# Altium PCB ART_CARD Rev 5.PcbDoc (part 11 of 13)
Units mil, origin at the board's own origin, x right, y up, seen from the top; angles counter-clockwise.
Board outline 6600.39 x 3903.54 mil, 8 copper layers (Top, Inner Layer 2, Inner Layer 3, Inner Layer 4, Inner Layer 5, Inner Layer 6, Inner Layer 7, Bottom), stack 63.111 mil thick; 542 components, 382 nets, 2410 pads, 1433 vias.
Unrouted connection lines stored in the file: 1247.
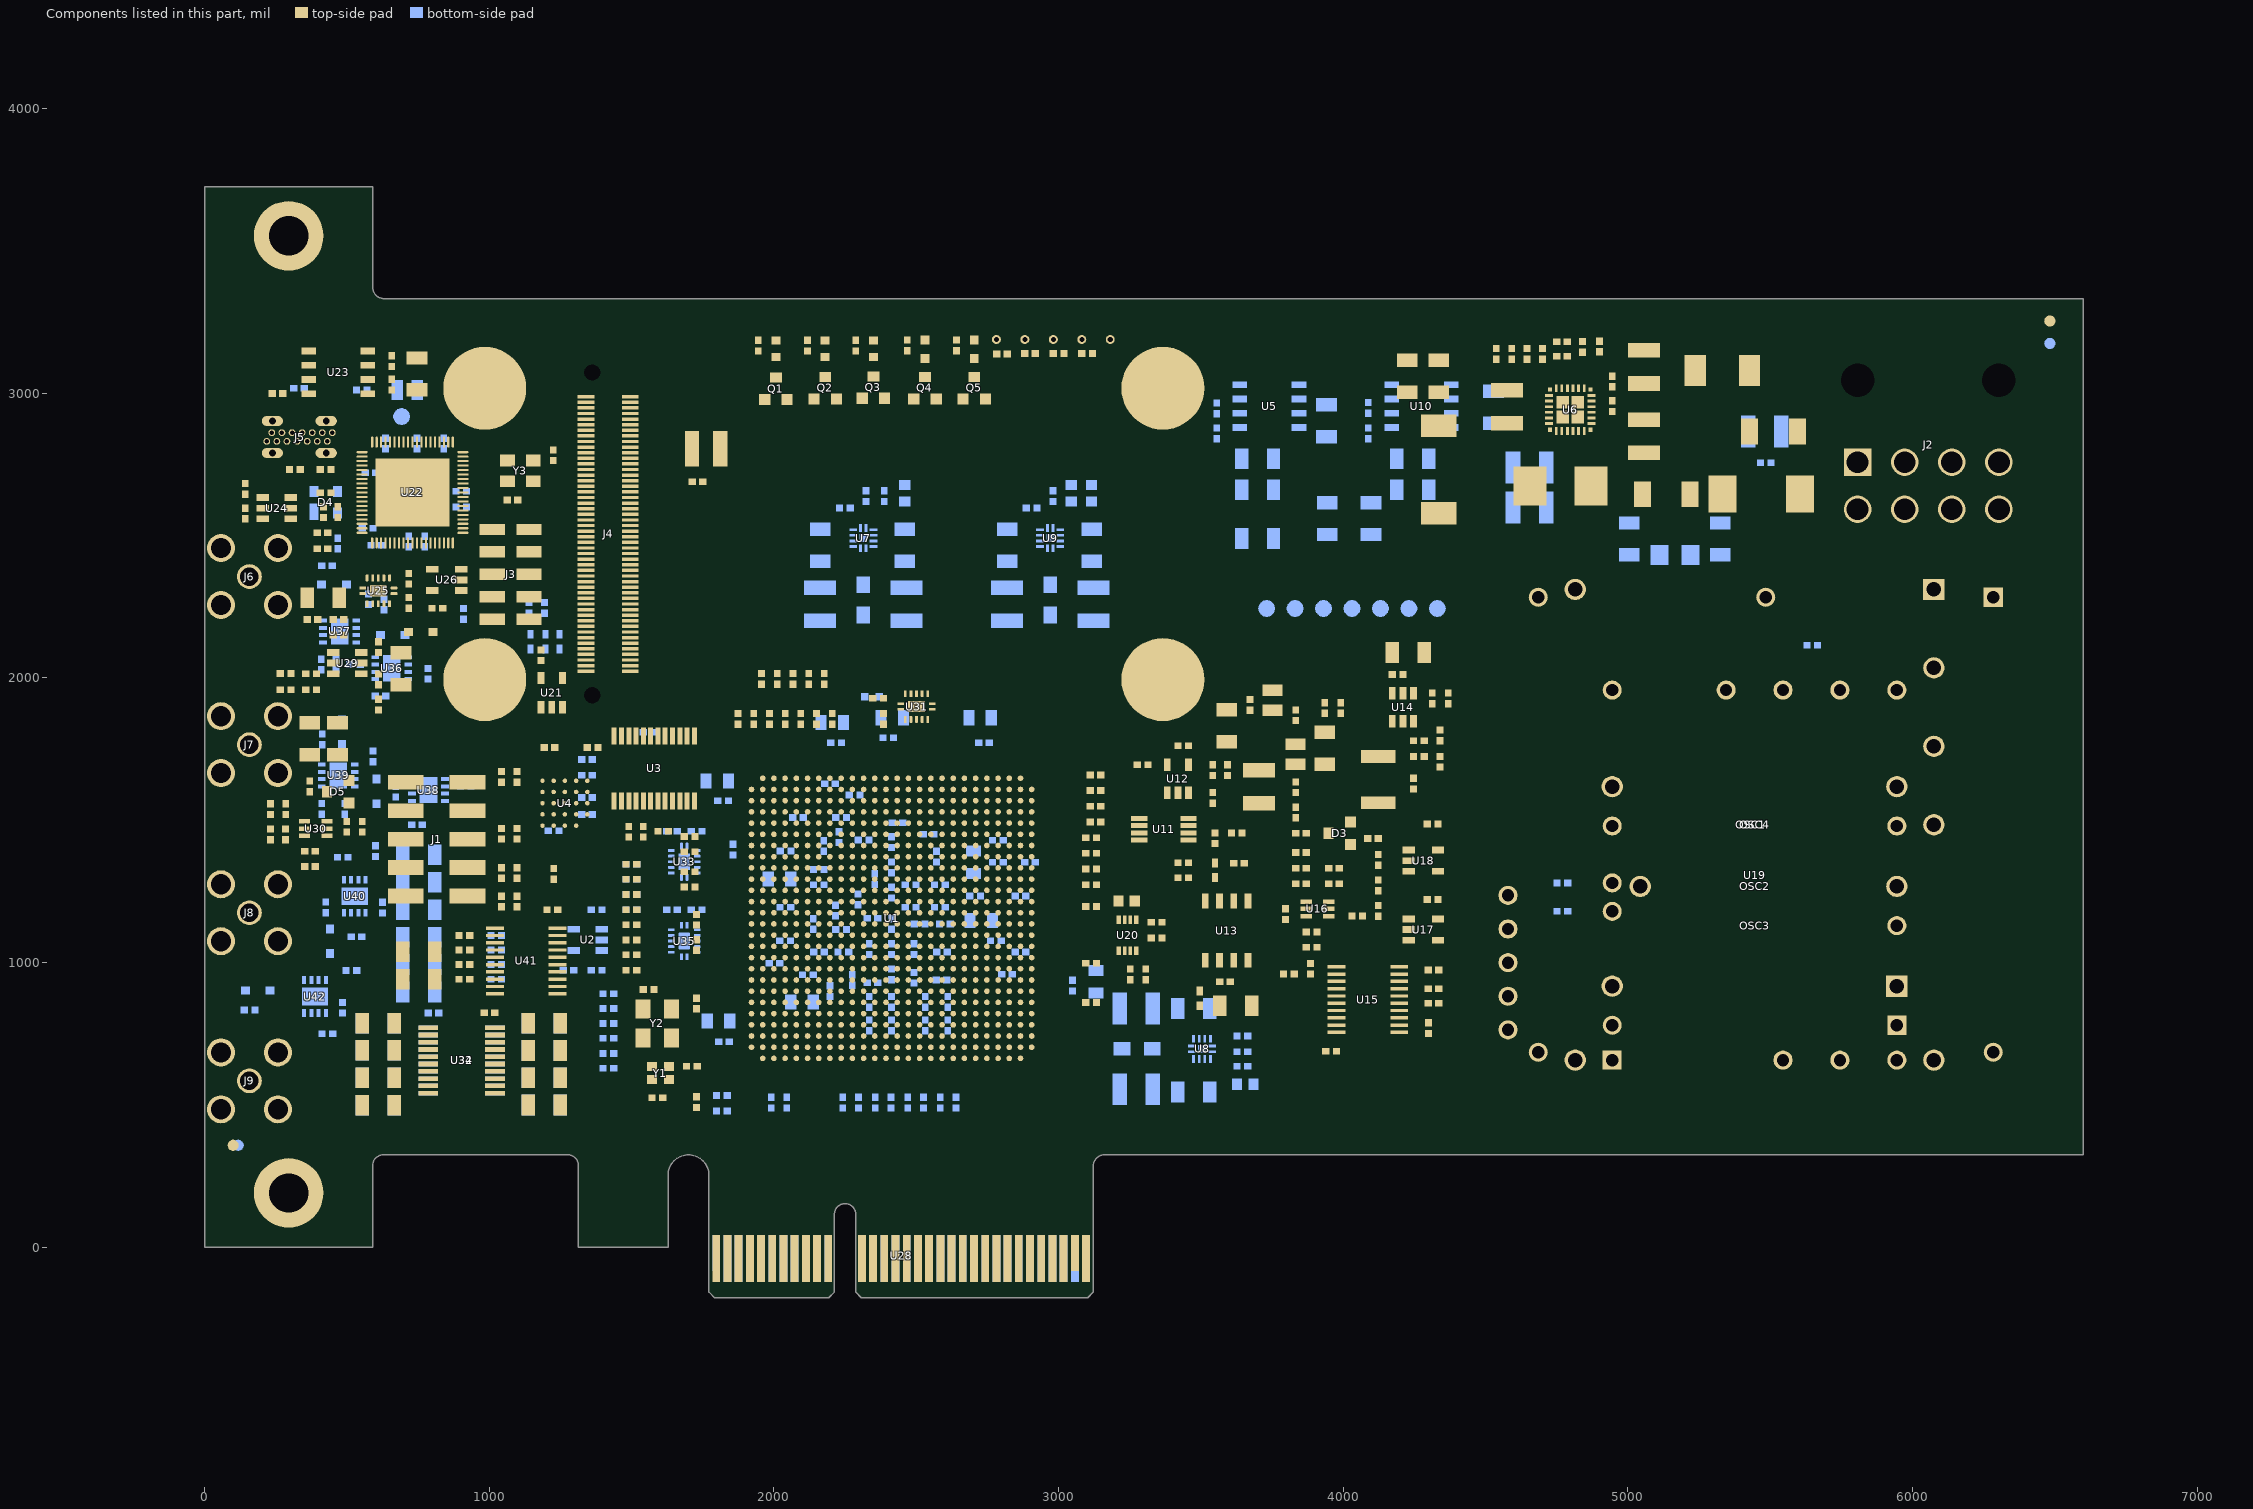
[diagram p17: the components of this part, seen from the top]

## Via types
v1: diameter 25.59, hole 11.81, Top to Bottom, 915 vias
v2: diameter 21.65, hole 9.84, Top to Bottom, 518 vias

## Nets (pads, with @x,y where several pads share a name; then routed paths per layer and width w, separated by ;. In a path a pad name is that pad's centre, name@x,y a point inside that pad or via, vN(x,y) a via of type N, cw(c..) or ccw(c..) an arc to the next point about the centre after c; other vN are vias at no path point) (continued)
copper on no net: (continued)
  Bottom w12.2: -370.08,-267.72 -370.08,-263.78 ; -370.08,4023.62 -370.08,4027.56 ; -366.14,-248.03 -279.53,-248.03 ; -366.14,4043.31 -279.53,4043.31 ; -358.27,-232.28 -275.59,-232.28 ; -358.27,4059.06 -275.59,4059.06 ; -354.33,-220.47 -275.59,-220.47 ; -354.33,4070.87 -275.59,4070.87 ; -346.46,-212.6 -279.53,-212.6 -350.39,-212.6 -275.59,-212.6 ; -346.46,4078.74 -279.53,4078.74 -350.39,4078.74 -275.59,4078.74 ; -338.58,-200.79 -279.53,-200.79 -334.65,-200.79 ; -338.58,4090.55 -279.53,4090.55 -334.65,4090.55 ; -334.65,-196.85 -275.59,-196.85 ; -334.65,4094.49 -275.59,4094.49 ; -326.77,-196.85 -275.59,-196.85 ; -326.77,4094.49 -275.59,4094.49 ; -322.83,-196.85 -330.71,-196.85 ; -322.83,4094.49 -330.71,4094.49 ; -311.02,-185.04 -275.59,-185.04 -299.21,-185.04 -279.53,-185.04 ; -311.02,4106.3 -275.59,4106.3 -299.21,4106.3 -279.53,4106.3 ; -307.09,-185.04 -279.53,-185.04 ; -307.09,4106.3 -279.53,4106.3 ; -303.15,-185.04 -279.53,-185.04 ; -303.15,4106.3 -279.53,4106.3 ; -279.53,-255.91 -370.08,-255.91 ; -279.53,-244.09 -366.14,-244.09 -275.59,-244.09 ; -279.53,-236.22 -362.2,-236.22 -275.59,-236.22 ; -279.53,-224.41 -354.33,-224.41 -275.59,-224.41 ; -279.53,4035.43 -370.08,4035.43 ; -279.53,4047.24 -366.14,4047.24 -275.59,4047.24 ; -279.53,4055.12 -362.2,4055.12 -275.59,4055.12 ; -279.53,4066.93 -354.33,4066.93 -275.59,4066.93 ; -275.59,-338.58 -200.79,-338.58 ; -275.59,-326.77 -196.85,-326.77 ; -275.59,-318.9 -188.98,-318.9 ; -275.59,-307.09 -185.04,-307.09 ; -275.59,3952.76 -200.79,3952.76 ; -275.59,3964.57 -196.85,3964.57 ; -275.59,3972.44 -188.98,3972.44 ; -275.59,3984.25 -185.04,3984.25 ; -271.65,-358.27 -224.41,-358.27 ; -271.65,-346.46 -208.66,-346.46 ; -271.65,-342.52 -208.66,-342.52 ; -271.65,-334.65 -200.79,-334.65 ; -271.65,-287.4 -181.1,-287.4 ; -271.65,-283.46 -181.1,-283.46 ; -271.65,3933.07 -224.41,3933.07 ; -271.65,3944.88 -208.66,3944.88 ; -271.65,3948.82 -208.66,3948.82 ; -271.65,3956.69 -200.79,3956.69 ; -271.65,4003.94 -181.1,4003.94 ; -271.65,4007.87 -181.1,4007.87 ; -248.03,-366.14 -271.65,-366.14 ; -248.03,3925.2 -271.65,3925.2 ; -240.16,-362.2 -275.59,-362.2 ; -240.16,3929.13 -275.59,3929.13 ; -236.22,-362.2 -275.59,-362.2 ; -236.22,3929.13 -275.59,3929.13 ; -224.41,-354.33 -275.59,-354.33 -220.47,-354.33 -271.65,-354.33 -216.54,-354.33 ; -224.41,3937.01 -275.59,3937.01 -220.47,3937.01 -271.65,3937.01 -216.54,3937.01 ; -216.54,-350.39 -275.59,-350.39 -212.6,-350.39 ; -216.54,3940.94 -275.59,3940.94 -212.6,3940.94 ; -212.6,-346.46 -275.59,-346.46 ; -212.6,3944.88 -275.59,3944.88 ; -204.72,-342.52 -275.59,-342.52 ; -204.72,3948.82 -275.59,3948.82 ; -200.79,-330.71 -271.65,-330.71 -196.85,-330.71 ; -200.79,3960.63 -271.65,3960.63 -196.85,3960.63 ; -188.98,-307.09 -271.65,-307.09 ; -188.98,3984.25 -271.65,3984.25 ; -185.04,-287.4 -275.59,-287.4 ; -185.04,-283.46 -275.59,-283.46 ; -185.04,4003.94 -275.59,4003.94 ; -185.04,4007.87 -275.59,4007.87 ; 6795.28,3629.92 6795.28,3633.86 ; 6799.21,3649.61 6885.83,3649.61 ; 6807.09,3665.35 6889.76,3665.35 ; 6811.02,3677.17 6889.76,3677.17 ; 6818.9,3685.04 6885.83,3685.04 6814.96,3685.04 6889.76,3685.04 ; 6826.77,3696.85 6885.83,3696.85 6830.71,3696.85 ; 6830.71,3700.79 6889.76,3700.79 ; 6838.58,3700.79 6889.76,3700.79 ; 6842.52,3700.79 6834.65,3700.79 ; 6854.33,3712.6 6889.76,3712.6 6866.14,3712.6 6885.83,3712.6 ; 6858.27,3712.6 6885.83,3712.6 ; 6862.2,3712.6 6885.83,3712.6 ; 6885.83,3641.73 6795.28,3641.73 ; 6885.83,3653.54 6799.21,3653.54 6889.76,3653.54 ; 6885.83,3661.42 6803.15,3661.42 6889.76,3661.42 ; 6885.83,3673.23 6811.02,3673.23 6889.76,3673.23 ; 6889.76,3559.06 6964.57,3559.06 ; 6889.76,3570.87 6968.5,3570.87 ; 6889.76,3578.74 6976.38,3578.74 ; 6889.76,3590.55 6980.32,3590.55 ; 6893.7,3539.37 6940.94,3539.37 ; 6893.7,3551.18 6956.69,3551.18 ; 6893.7,3555.12 6956.69,3555.12 ; 6893.7,3562.99 6964.57,3562.99 ; 6893.7,3610.24 6984.25,3610.24 ; 6893.7,3614.17 6984.25,3614.17 ; 6917.32,3531.5 6893.7,3531.5 ; 6925.2,3535.43 6889.76,3535.43 ; 6929.13,3535.43 6889.76,3535.43 ; 6940.94,3543.31 6889.76,3543.31 6944.88,3543.31 6893.7,3543.31 6948.82,3543.31 ; 6948.82,3547.24 6889.76,3547.24 6952.76,3547.24 ; 6952.76,3551.18 6889.76,3551.18 ; 6960.63,3555.12 6889.76,3555.12 ; 6964.57,3566.93 6893.7,3566.93 6968.5,3566.93 ; 6976.38,3590.55 6893.7,3590.55 ; 6980.32,3610.24 6889.76,3610.24 ; 6980.32,3614.17 6889.76,3614.17 ; -425.2,-275.59 -125.98,-275.59 ; -425.2,-275.59 -125.98,-275.59 ; -425.2,-275.59 -125.98,-275.59 ; -425.2,-275.59 -125.98,-275.59 ; -425.2,-275.59 -125.98,-275.59 ; -425.2,-275.59 -125.98,-275.59 ; -425.2,-275.59 -125.98,-275.59 ; -425.2,-275.59 -125.98,-275.59 ; -425.2,-275.59 -125.98,-275.59 ; -425.2,-275.59 -125.98,-275.59 ; -425.2,-275.59 -125.98,-275.59 ; -425.2,4015.75 -125.98,4015.75 ; -425.2,4015.75 -125.98,4015.75 ; -425.2,4015.75 -125.98,4015.75 ; -425.2,4015.75 -125.98,4015.75 ; -425.2,4015.75 -125.98,4015.75 ; -425.2,4015.75 -125.98,4015.75 ; -425.2,4015.75 -125.98,4015.75 ; -425.2,4015.75 -125.98,4015.75 ; -425.2,4015.75 -125.98,4015.75 ; -425.2,4015.75 -125.98,4015.75 ; -425.2,4015.75 -125.98,4015.75 ; -370.08,-263.78 -275.59,-263.78 ; -370.08,-263.78 -275.59,-263.78 ; -370.08,-263.78 -279.53,-263.78 -370.08,-263.78 ; -370.08,-263.78 -275.59,-263.78 ; -370.08,-263.78 -275.59,-263.78 ; -370.08,-263.78 -275.59,-263.78 ; -370.08,-263.78 -275.59,-263.78 ; -370.08,-263.78 -275.59,-263.78 ; -370.08,-263.78 -275.59,-263.78 ; -370.08,-263.78 -275.59,-263.78 ; -370.08,-255.91 -275.59,-255.91 -370.08,-255.91 ; -370.08,-251.97 -275.59,-251.97 ; -370.08,-251.97 -279.53,-251.97 ; -370.08,-251.97 -279.53,-251.97 ; -370.08,-251.97 -279.53,-251.97 ; -370.08,-251.97 -275.59,-251.97 ; -370.08,-251.97 -275.59,-251.97 ; -370.08,4027.56 -275.59,4027.56 ; -370.08,4027.56 -275.59,4027.56 ; -370.08,4027.56 -279.53,4027.56 -370.08,4027.56 ; -370.08,4027.56 -275.59,4027.56 ; -370.08,4027.56 -275.59,4027.56 ; -370.08,4027.56 -275.59,4027.56 ; -370.08,4027.56 -275.59,4027.56 ; -370.08,4027.56 -275.59,4027.56 ; -370.08,4027.56 -275.59,4027.56 ; -370.08,4027.56 -275.59,4027.56 ; -370.08,4035.43 -275.59,4035.43 -370.08,4035.43 ; -370.08,4039.37 -275.59,4039.37 ; -370.08,4039.37 -279.53,4039.37 ; -370.08,4039.37 -279.53,4039.37 ; -370.08,4039.37 -279.53,4039.37 ; -370.08,4039.37 -275.59,4039.37 ; -370.08,4039.37 -275.59,4039.37 ; -366.14,-240.16 -279.53,-240.16 ; -366.14,-240.16 -279.53,-240.16 ; -366.14,-240.16 -275.59,-240.16 ; -366.14,-240.16 -275.59,-240.16 ; -366.14,4051.18 -279.53,4051.18 ; -366.14,4051.18 -279.53,4051.18 ; -366.14,4051.18 -275.59,4051.18 ; -366.14,4051.18 -275.59,4051.18 ; -362.2,-240.16 -275.59,-240.16 ; -362.2,-240.16 -279.53,-240.16 ; -362.2,-240.16 -279.53,-240.16 ; -362.2,-240.16 -275.59,-240.16 ; -362.2,4051.18 -275.59,4051.18 ; -362.2,4051.18 -279.53,4051.18 ; -362.2,4051.18 -279.53,4051.18 ; -362.2,4051.18 -275.59,4051.18 ; -358.27,-228.35 -279.53,-228.35 ; -358.27,-228.35 -279.53,-228.35 ; -358.27,-228.35 -279.53,-228.35 ; -358.27,-228.35 -279.53,-228.35 ; -358.27,-228.35 -279.53,-228.35 ; -358.27,-228.35 -275.59,-228.35 -358.27,-228.35 ; -358.27,-228.35 -279.53,-228.35 ; -358.27,4062.99 -279.53,4062.99 ; -358.27,4062.99 -279.53,4062.99 ; -358.27,4062.99 -279.53,4062.99 ; -358.27,4062.99 -279.53,4062.99 ; -358.27,4062.99 -279.53,4062.99 ; -358.27,4062.99 -275.59,4062.99 -358.27,4062.99 ; -358.27,4062.99 -279.53,4062.99 ; -350.39,-216.54 -279.53,-216.54 ; -350.39,-216.54 -279.53,-216.54 ; -350.39,-216.54 -279.53,-216.54 ; -350.39,-216.54 -279.53,-216.54 ; -350.39,-216.54 -275.59,-216.54 -354.33,-216.54 -279.53,-216.54 ; -350.39,-216.54 -279.53,-216.54 ; -350.39,4074.8 -279.53,4074.8 ; -350.39,4074.8 -279.53,4074.8 ; -350.39,4074.8 -279.53,4074.8 ; -350.39,4074.8 -279.53,4074.8 ; -350.39,4074.8 -275.59,4074.8 -354.33,4074.8 -279.53,4074.8 ; -350.39,4074.8 -279.53,4074.8 ; -342.52,-204.72 -279.53,-204.72 ; -342.52,-204.72 -279.53,-204.72 ; -342.52,-204.72 -279.53,-204.72 ; -342.52,-204.72 -279.53,-204.72 ; -342.52,-204.72 -275.59,-204.72 ; -342.52,-204.72 -279.53,-204.72 ; -342.52,-204.72 -275.59,-204.72 ; -342.52,4086.61 -279.53,4086.61 ; -342.52,4086.61 -279.53,4086.61 ; -342.52,4086.61 -279.53,4086.61 ; -342.52,4086.61 -279.53,4086.61 ; -342.52,4086.61 -275.59,4086.61 ; -342.52,4086.61 -279.53,4086.61 ; -342.52,4086.61 -275.59,4086.61 ; -330.71,-196.85 -275.59,-196.85 ; -330.71,-196.85 -275.59,-196.85 ; -330.71,4094.49 -275.59,4094.49 ; -330.71,4094.49 -275.59,4094.49 ; -322.83,-192.91 -279.53,-192.91 ; -322.83,-192.91 -279.53,-192.91 ; -322.83,-192.91 -279.53,-192.91 ; -322.83,4098.43 -279.53,4098.43 ; -322.83,4098.43 -279.53,4098.43 ; -322.83,4098.43 -279.53,4098.43 ; -318.9,-188.98 -279.53,-188.98 ; -318.9,-188.98 -279.53,-188.98 ; -318.9,-188.98 -275.59,-188.98 ; -318.9,4102.36 -279.53,4102.36 ; -318.9,4102.36 -279.53,4102.36 ; -318.9,4102.36 -275.59,4102.36 ; -311.02,-188.98 -275.59,-188.98 ; -311.02,-188.98 -279.53,-188.98 ; -311.02,-188.98 -275.59,-188.98 ; -311.02,4102.36 -275.59,4102.36 ; -311.02,4102.36 -279.53,4102.36 ; -311.02,4102.36 -275.59,4102.36 ; -279.53,-251.97 -366.14,-251.97 -279.53,-251.97 ; -279.53,-204.72 -338.58,-204.72 -275.59,-204.72 ; -279.53,-192.91 -326.77,-192.91 -279.53,-192.91 ; -279.53,4039.37 -366.14,4039.37 -279.53,4039.37 ; -279.53,4086.61 -338.58,4086.61 -275.59,4086.61 ; -279.53,4098.43 -326.77,4098.43 -279.53,4098.43 ; -275.59,-425.2 -275.59,-125.98 ; -275.59,-425.2 -275.59,-125.98 ; -275.59,-425.2 -275.59,-125.98 ; -275.59,-425.2 -275.59,-125.98 ; -275.59,-425.2 -275.59,-125.98 ; -275.59,-425.2 -275.59,-125.98 ; -275.59,-425.2 -275.59,-125.98 ; -275.59,-425.2 -275.59,-125.98 ; -275.59,-425.2 -275.59,-125.98 ; -275.59,-425.2 -275.59,-125.98 ; -275.59,-425.2 -275.59,-125.98 ; -275.59,-366.14 -244.09,-366.14 -275.59,-366.14 ; -275.59,-366.14 -240.16,-366.14 -271.65,-366.14 ; -275.59,-366.14 -251.97,-366.14 -271.65,-366.14 ; -275.59,-362.2 -232.28,-362.2 -275.59,-362.2 ; -275.59,-358.27 -224.41,-358.27 ; -275.59,-358.27 -224.41,-358.27 ; -275.59,-358.27 -224.41,-358.27 ; -275.59,-358.27 -224.41,-358.27 ; -275.59,-346.46 -208.66,-346.46 ; -275.59,-346.46 -208.66,-346.46 ; -275.59,-346.46 -208.66,-346.46 ; -275.59,-346.46 -208.66,-346.46 ; -275.59,-342.52 -208.66,-342.52 ; -275.59,-342.52 -208.66,-342.52 ; -275.59,-334.65 -200.79,-334.65 ; -275.59,-334.65 -200.79,-334.65 ; -275.59,-334.65 -200.79,-334.65 ; -275.59,-334.65 -200.79,-334.65 ; -275.59,-334.65 -200.79,-334.65 ; -275.59,-330.71 -196.85,-330.71 ; -275.59,-330.71 -196.85,-330.71 ; -275.59,-330.71 -196.85,-330.71 ; -275.59,-322.83 -192.91,-322.83 ; -275.59,-322.83 -192.91,-322.83 ; -275.59,-322.83 -192.91,-322.83 ; -275.59,-311.02 -185.04,-311.02 ; -275.59,-311.02 -185.04,-311.02 ; -275.59,-311.02 -188.98,-311.02 -271.65,-311.02 -185.04,-311.02 ; -275.59,-311.02 -185.04,-311.02 ; -275.59,-299.21 -181.1,-299.21 ; -275.59,-299.21 -181.1,-299.21 ; -275.59,-299.21 -181.1,-299.21 ; -275.59,-287.4 -181.1,-287.4 ; -275.59,-287.4 -181.1,-287.4 ; -275.59,-287.4 -181.1,-287.4 ; -275.59,-287.4 -181.1,-287.4 ; -275.59,-283.46 -181.1,-283.46 ; -275.59,-283.46 -181.1,-283.46 ; -275.59,-283.46 -181.1,-283.46 ; -275.59,3866.14 -275.59,4165.35 ; -275.59,3866.14 -275.59,4165.35 ; -275.59,3866.14 -275.59,4165.35 ; -275.59,3866.14 -275.59,4165.35 ; -275.59,3866.14 -275.59,4165.35 ; -275.59,3866.14 -275.59,4165.35 ; -275.59,3866.14 -275.59,4165.35 ; -275.59,3866.14 -275.59,4165.35 ; -275.59,3866.14 -275.59,4165.35 ; -275.59,3866.14 -275.59,4165.35 ; -275.59,3866.14 -275.59,4165.35 ; -275.59,3925.2 -244.09,3925.2 -275.59,3925.2 ; -275.59,3925.2 -240.16,3925.2 -271.65,3925.2 ; -275.59,3925.2 -251.97,3925.2 -271.65,3925.2 ; -275.59,3929.13 -232.28,3929.13 -275.59,3929.13 ; -275.59,3933.07 -224.41,3933.07 ; -275.59,3933.07 -224.41,3933.07 ; -275.59,3933.07 -224.41,3933.07 ; -275.59,3933.07 -224.41,3933.07 ; -275.59,3944.88 -208.66,3944.88 ; -275.59,3944.88 -208.66,3944.88 ; -275.59,3944.88 -208.66,3944.88 ; -275.59,3944.88 -208.66,3944.88 ; -275.59,3948.82 -208.66,3948.82 ; -275.59,3948.82 -208.66,3948.82 ; -275.59,3956.69 -200.79,3956.69 ; -275.59,3956.69 -200.79,3956.69 ; -275.59,3956.69 -200.79,3956.69 ; -275.59,3956.69 -200.79,3956.69 ; -275.59,3956.69 -200.79,3956.69 ; -275.59,3960.63 -196.85,3960.63 ; -275.59,3960.63 -196.85,3960.63 ; -275.59,3960.63 -196.85,3960.63 ; -275.59,3968.5 -192.91,3968.5 ; -275.59,3968.5 -192.91,3968.5 ; -275.59,3968.5 -192.91,3968.5 ; -275.59,3980.31 -185.04,3980.31 ; -275.59,3980.31 -185.04,3980.31 ; -275.59,3980.31 -188.98,3980.31 -271.65,3980.31 -185.04,3980.31 ; -275.59,3980.31 -185.04,3980.31 ; -275.59,3992.13 -181.1,3992.13 ; -275.59,3992.13 -181.1,3992.13 ; -275.59,3992.13 -181.1,3992.13 ; -275.59,4003.94 -181.1,4003.94 ; -275.59,4003.94 -181.1,4003.94 ; -275.59,4003.94 -181.1,4003.94 ; -275.59,4003.94 -181.1,4003.94 ; -275.59,4007.87 -181.1,4007.87 ; -275.59,4007.87 -181.1,4007.87 ; -275.59,4007.87 -181.1,4007.87 ; -271.65,-322.83 -192.91,-322.83 ; -271.65,-322.83 -192.91,-322.83 ; -271.65,-322.83 -192.91,-322.83 ; -271.65,-318.9 -188.98,-318.9 ; -271.65,-318.9 -188.98,-318.9 ; -271.65,-318.9 -188.98,-318.9 ; -271.65,-318.9 -188.98,-318.9 ; -271.65,-307.09 -185.04,-307.09 ; -271.65,-307.09 -185.04,-307.09 ; -271.65,-307.09 -185.04,-307.09 ; -271.65,-299.21 -181.1,-299.21 ; -271.65,-299.21 -181.1,-299.21 ; -271.65,-299.21 -181.1,-299.21 ; -271.65,-295.28 -181.1,-295.28 ; -271.65,-295.28 -181.1,-295.28 ; -271.65,-295.28 -181.1,-295.28 ; -271.65,3968.5 -192.91,3968.5 ; -271.65,3968.5 -192.91,3968.5 ; -271.65,3968.5 -192.91,3968.5 ; -271.65,3972.44 -188.98,3972.44 ; -271.65,3972.44 -188.98,3972.44 ; -271.65,3972.44 -188.98,3972.44 ; -271.65,3972.44 -188.98,3972.44 ; -271.65,3984.25 -185.04,3984.25 ; -271.65,3984.25 -185.04,3984.25 ; -271.65,3984.25 -185.04,3984.25 ; -271.65,3992.13 -181.1,3992.13 ; -271.65,3992.13 -181.1,3992.13 ; -271.65,3992.13 -181.1,3992.13 ; -271.65,3996.06 -181.1,3996.06 ; -271.65,3996.06 -181.1,3996.06 ; -271.65,3996.06 -181.1,3996.06 ; -200.79,-334.65 -196.85,-330.71 ; -200.79,3956.69 -196.85,3960.63 ; -181.1,-295.28 -275.59,-295.28 -181.1,-295.28 ; -181.1,3996.06 -275.59,3996.06 -181.1,3996.06 ; -177.17,-275.59 ccw(c-275.59,-275.59) -177.17,-275.59 ; -177.17,-275.59 ccw(c-275.59,-275.59) -177.17,-275.59 ; -177.17,-275.59 ccw(c-275.59,-275.59) -177.17,-275.59 ; -177.17,-275.59 ccw(c-275.59,-275.59) -177.17,-275.59 ; -177.17,-275.59 ccw(c-275.59,-275.59) -177.17,-275.59 ; -177.17,-275.59 ccw(c-275.59,-275.59) -177.17,-275.59 ; -177.17,-275.59 ccw(c-275.59,-275.59) -177.17,-275.59 ; -177.17,-275.59 ccw(c-275.59,-275.59) -177.17,-275.59 ; -177.17,-275.59 ccw(c-275.59,-275.59) -177.17,-275.59 ; -177.17,-275.59 ccw(c-275.59,-275.59) -177.17,-275.59 ; -177.17,-275.59 ccw(c-275.59,-275.59) -177.17,-275.59 ; -177.17,4015.75 ccw(c-275.59,4015.75) -177.17,4015.75 ; -177.17,4015.75 ccw(c-275.59,4015.75) -177.17,4015.75 ; -177.17,4015.75 ccw(c-275.59,4015.75) -177.17,4015.75 ; -177.17,4015.75 ccw(c-275.59,4015.75) -177.17,4015.75 ; -177.17,4015.75 ccw(c-275.59,4015.75) -177.17,4015.75 ; -177.17,4015.75 ccw(c-275.59,4015.75) -177.17,4015.75 ; -177.17,4015.75 ccw(c-275.59,4015.75) -177.17,4015.75 ; -177.17,4015.75 ccw(c-275.59,4015.75) -177.17,4015.75 ; -177.17,4015.75 ccw(c-275.59,4015.75) -177.17,4015.75 ; -177.17,4015.75 ccw(c-275.59,4015.75) -177.17,4015.75 ; -177.17,4015.75 ccw(c-275.59,4015.75) -177.17,4015.75 ; 6740.16,3622.05 7039.37,3622.05 ; 6740.16,3622.05 7039.37,3622.05 ; 6740.16,3622.05 7039.37,3622.05 ; 6740.16,3622.05 7039.37,3622.05 ; 6740.16,3622.05 7039.37,3622.05 ; 6740.16,3622.05 7039.37,3622.05 ; 6740.16,3622.05 7039.37,3622.05 ; 6740.16,3622.05 7039.37,3622.05 ; 6740.16,3622.05 7039.37,3622.05 ; 6740.16,3622.05 7039.37,3622.05 ; 6740.16,3622.05 7039.37,3622.05 ; 6795.28,3633.86 6889.76,3633.86 ; 6795.28,3633.86 6889.76,3633.86 ; 6795.28,3633.86 6885.83,3633.86 6795.28,3633.86 ; 6795.28,3633.86 6889.76,3633.86 ; 6795.28,3633.86 6889.76,3633.86 ; 6795.28,3633.86 6889.76,3633.86 ; 6795.28,3633.86 6889.76,3633.86 ; 6795.28,3633.86 6889.76,3633.86 ; 6795.28,3633.86 6889.76,3633.86 ; 6795.28,3633.86 6889.76,3633.86 ; 6795.28,3641.73 6889.76,3641.73 6795.28,3641.73 ; 6795.28,3645.67 6889.76,3645.67 ; 6795.28,3645.67 6885.83,3645.67 ; 6795.28,3645.67 6885.83,3645.67 ; 6795.28,3645.67 6885.83,3645.67 ; 6795.28,3645.67 6889.76,3645.67 ; 6795.28,3645.67 6889.76,3645.67 ; 6799.21,3657.48 6885.83,3657.48 ; 6799.21,3657.48 6885.83,3657.48 ; 6799.21,3657.48 6889.76,3657.48 ; 6799.21,3657.48 6889.76,3657.48 ; 6803.15,3657.48 6889.76,3657.48 ; 6803.15,3657.48 6885.83,3657.48 ; 6803.15,3657.48 6885.83,3657.48 ; 6803.15,3657.48 6889.76,3657.48 ; 6807.09,3669.29 6885.83,3669.29 ; 6807.09,3669.29 6885.83,3669.29 ; 6807.09,3669.29 6885.83,3669.29 ; 6807.09,3669.29 6885.83,3669.29 ; 6807.09,3669.29 6885.83,3669.29 ; 6807.09,3669.29 6889.76,3669.29 6807.09,3669.29 ; 6807.09,3669.29 6885.83,3669.29 ; 6814.96,3681.1 6885.83,3681.1 ; 6814.96,3681.1 6885.83,3681.1 ; 6814.96,3681.1 6885.83,3681.1 ; 6814.96,3681.1 6885.83,3681.1 ; 6814.96,3681.1 6889.76,3681.1 6811.02,3681.1 6885.83,3681.1 ; 6814.96,3681.1 6885.83,3681.1 ; 6822.83,3692.91 6885.83,3692.91 ; 6822.83,3692.91 6885.83,3692.91 ; 6822.83,3692.91 6885.83,3692.91 ; 6822.83,3692.91 6885.83,3692.91 ; 6822.83,3692.91 6889.76,3692.91 ; 6822.83,3692.91 6885.83,3692.91 ; 6822.83,3692.91 6889.76,3692.91 ; 6834.65,3700.79 6889.76,3700.79 ; 6834.65,3700.79 6889.76,3700.79 ; 6842.52,3704.72 6885.83,3704.72 ; 6842.52,3704.72 6885.83,3704.72 ; 6842.52,3704.72 6885.83,3704.72 ; 6846.46,3708.66 6885.83,3708.66 ; 6846.46,3708.66 6885.83,3708.66 ; 6846.46,3708.66 6889.76,3708.66 ; 6854.33,3708.66 6889.76,3708.66 ; 6854.33,3708.66 6885.83,3708.66 ; 6854.33,3708.66 6889.76,3708.66 ; 6885.83,3645.67 6799.21,3645.67 6885.83,3645.67 ; 6885.83,3692.91 6826.77,3692.91 6889.76,3692.91 ; 6885.83,3704.72 6838.58,3704.72 6885.83,3704.72 ; 6889.76,3472.44 6889.76,3771.65 ; 6889.76,3472.44 6889.76,3771.65 ; 6889.76,3472.44 6889.76,3771.65 ; 6889.76,3472.44 6889.76,3771.65 ; 6889.76,3472.44 6889.76,3771.65 ; 6889.76,3472.44 6889.76,3771.65 ; 6889.76,3472.44 6889.76,3771.65 ; 6889.76,3472.44 6889.76,3771.65 ; 6889.76,3472.44 6889.76,3771.65 ; 6889.76,3472.44 6889.76,3771.65 ; 6889.76,3472.44 6889.76,3771.65 ; 6889.76,3531.5 6921.26,3531.5 6889.76,3531.5 ; 6889.76,3531.5 6925.2,3531.5 6893.7,3531.5 ; 6889.76,3531.5 6913.39,3531.5 6893.7,3531.5 ; 6889.76,3535.43 6933.07,3535.43 6889.76,3535.43 ; 6889.76,3539.37 6940.94,3539.37 ; 6889.76,3539.37 6940.94,3539.37 ; 6889.76,3539.37 6940.94,3539.37 ; 6889.76,3539.37 6940.94,3539.37 ; 6889.76,3551.18 6956.69,3551.18 ; 6889.76,3551.18 6956.69,3551.18 ; 6889.76,3551.18 6956.69,3551.18 ; 6889.76,3551.18 6956.69,3551.18 ; 6889.76,3555.12 6956.69,3555.12 ; 6889.76,3555.12 6956.69,3555.12 ; 6889.76,3562.99 6964.57,3562.99 ; 6889.76,3562.99 6964.57,3562.99 ; 6889.76,3562.99 6964.57,3562.99 ; 6889.76,3562.99 6964.57,3562.99 ; 6889.76,3562.99 6964.57,3562.99 ; 6889.76,3566.93 6968.5,3566.93 ; 6889.76,3566.93 6968.5,3566.93 ; 6889.76,3566.93 6968.5,3566.93 ; 6889.76,3574.8 6972.44,3574.8 ; 6889.76,3574.8 6972.44,3574.8 ; 6889.76,3574.8 6972.44,3574.8 ; 6889.76,3586.61 6980.32,3586.61 ; 6889.76,3586.61 6980.32,3586.61 ; 6889.76,3586.61 6976.38,3586.61 6893.7,3586.61 6980.32,3586.61 ; 6889.76,3586.61 6980.32,3586.61 ; 6889.76,3598.43 6984.25,3598.43 ; 6889.76,3598.43 6984.25,3598.43 ; 6889.76,3598.43 6984.25,3598.43 ; 6889.76,3610.24 6984.25,3610.24 ; 6889.76,3610.24 6984.25,3610.24 ; 6889.76,3610.24 6984.25,3610.24 ; 6889.76,3610.24 6984.25,3610.24 ; 6889.76,3614.17 6984.25,3614.17 ; 6889.76,3614.17 6984.25,3614.17 ; 6889.76,3614.17 6984.25,3614.17 ; 6893.7,3574.8 6972.44,3574.8 ; 6893.7,3574.8 6972.44,3574.8 ; 6893.7,3574.8 6972.44,3574.8 ; 6893.7,3578.74 6976.38,3578.74 ; 6893.7,3578.74 6976.38,3578.74 ; 6893.7,3578.74 6976.38,3578.74 ; 6893.7,3578.74 6976.38,3578.74 ; 6893.7,3590.55 6980.32,3590.55 ; 6893.7,3590.55 6980.32,3590.55 ; 6893.7,3590.55 6980.32,3590.55 ; 6893.7,3598.43 6984.25,3598.43 ; 6893.7,3598.43 6984.25,3598.43 ; 6893.7,3598.43 6984.25,3598.43 ; 6893.7,3602.36 6984.25,3602.36 ; 6893.7,3602.36 6984.25,3602.36 ; 6893.7,3602.36 6984.25,3602.36 ; 6964.57,3562.99 6968.5,3566.93 ; 6984.25,3602.36 6889.76,3602.36 6984.25,3602.36 ; 6988.19,3622.05 ccw(c6889.76,3622.05) 6988.19,3622.05 ; 6988.19,3622.05 ccw(c6889.76,3622.05) 6988.19,3622.05 ; 6988.19,3622.05 ccw(c6889.76,3622.05) 6988.19,3622.05 ; 6988.19,3622.05 ccw(c6889.76,3622.05) 6988.19,3622.05 ; 6988.19,3622.05 ccw(c6889.76,3622.05) 6988.19,3622.05 ; 6988.19,3622.05 ccw(c6889.76,3622.05) 6988.19,3622.05 ; 6988.19,3622.05 ccw(c6889.76,3622.05) 6988.19,3622.05 ; 6988.19,3622.05 ccw(c6889.76,3622.05) 6988.19,3622.05 ; 6988.19,3622.05 ccw(c6889.76,3622.05) 6988.19,3622.05 ; 6988.19,3622.05 ccw(c6889.76,3622.05) 6988.19,3622.05 ; 6988.19,3622.05 ccw(c6889.76,3622.05) 6988.19,3622.05

## Polygon pours and split planes (outlines as drawn)
12.0V on Top "Top-12.0V" (solid, remove dead copper, pour order 33): 4858.27,2937.99 4858.27,2888.78 4909.45,2888.78 4951.77,2846.46 5228.35,2846.46 5312.99,2931.1 5312.99,3202.76 5146.65,3202.76 5146.65,3107.28 5137.8,3098.43 4980.32,3098.43 4980.32,2968.5 4960.63,2948.82 4921.26,2948.82 4910.43,2937.99
N17212740 on Top "Top-N17212740" (solid, remove dead copper, pour order 32): 5523.62,2948.82 5523.62,2783.46 5716.54,2783.46 5716.54,2673.23 6421.26,2673.23 6421.26,2948.82
N14301 on Top "Top-N14301" (solid, remove dead copper, pour order 28): 4430.12,3059.06 4149.61,3059.06 4149.61,2429.13 4244.09,2429.13 4244.09,2803.15 4430.12,2803.15
12.0V on Top "Top-12.0V 1" (solid, remove dead copper, pour order 23): 4736.22,2937.99 4448.82,2937.99 4448.82,2830.71 4638.78,2830.71 4696.85,2888.78 4736.22,2888.78
N70046 on Top "Top-N70046" (solid, remove dead copper, pour order 19): 4762.8,2883.86 4762.8,2529.53 4966.54,2529.53 4966.54,2739.17 4851.38,2854.33 4851.38,2883.86
N17212690 on Top "Top-N17212690" (solid, remove dead copper, pour order 18): 5503.94,3202.76 5322.83,3202.76 5322.83,2921.26 5137.8,2736.22 5137.8,2529.53 5503.94,2529.53
PCIE_12.0V on Top "Top-PCIE_12.0V" (solid, remove dead copper, pour order 3): 5127.95,2736.22 4976.38,2736.22 4976.38,2529.53 5127.95,2529.53
GND on Top "Top-GND" (solid, remove dead copper, pour order 1): 223 vertices, not listed, extent 9.94,-167.23 6590.46,3716.44
5.0V on Top "Top-5.0V" (solid, remove dead copper, pour order 0): 4752.95,2803.15 4514.76,2803.15 4514.76,2529.53 4752.95,2529.53
0.9V on Inner Layer 7 "Inner Layer 7-0.9V" (solid, remove dead copper, pour order 37): 35 vertices, not listed, extent 2037.4,870.08 2970.47,2133.86
GND on Inner Layer 7 "Inner Layer 7-GND" (solid, remove dead copper, pour order 36): 3106.3,-167.32 3106.3,751.97 2279.53,751.97 2279.53,860.24 2086.61,860.24 2086.61,334.65 1698.82,334.65 1698.82,-167.32
12.0V on Inner Layer 7 "Inner Layer 7-12.0V" (solid, remove dead copper, pour order 34): 4437.01,2984.25 4437.01,2818.9 5167.32,2818.9 5167.32,3011.81 4968.5,3011.81 4940.94,2984.25
0.95V on Inner Layer 7 "Inner Layer 7-0.95V" (solid, remove dead copper, pour order 31): 2283.46,913.39 2283.46,761.81 3183.07,761.81 3183.07,913.39
1.8V on Inner Layer 7 "Inner Layer 7-1.8V" (solid, remove dead copper, pour order 20): 68 vertices, not listed, extent 496.06,334.65 4053.15,2287.4
3.3V on Inner Layer 7 "Inner Layer 7-3.3V" (solid, remove dead copper, pour order 14): 223 vertices, not listed, extent 9.94,-167.23 6590.46,3716.44
3.3V_USB on Inner Layer 7 "Inner Layer 7-3.3V_USB" (solid, remove dead copper, pour order 9): 1018.7,2401.57 1018.7,3208.66 118.11,3208.66 118.11,2519.69 314.96,2519.69 314.96,2421.26 472.44,2421.26 472.44,2145.67 826.77,2145.67 826.77,2244.09 728.35,2244.09 728.35,2312.99 807.09,2312.99 807.09,2401.57
5.0V on Inner Layer 7 "Inner Layer 7-5.0V" (solid, remove dead copper, pour order 2): 37 vertices, not listed, extent 711.61,503.94 4744.09,3230.31
GND on Inner Layer 4 "Inner Layer 4-GND" (solid, remove dead copper, pour order 4): 223 vertices, not listed, extent 9.94,-167.23 6590.46,3716.44
N17212690 on Bottom "Bottom-N17212690" (solid, remove dead copper, pour order 39): 5484.25,2972.44 5322.83,2972.44 5322.83,2700.79 5484.25,2700.79
N105192 on Bottom "Bottom-N105192" (solid, remove dead copper, pour order 38): 3297.24,759.84 3297.24,637.8 3402.56,637.8 3446.85,682.09 3484.25,682.09 3484.25,711.61 3446.85,711.61 3398.62,759.84
1.8V on Bottom "Bottom-1.8V" (solid, remove dead copper, pour order 35): 2087.6,2252.95 2087.6,2105.31 2224.41,2105.31 2224.41,1732.28 2346.46,1732.28 2346.46,1968.5 2559.06,1968.5 2559.06,2252.95
0.95V on Bottom "Bottom-0.95V" (solid, remove dead copper, pour order 30): 3258.86,913.39 3001.97,913.39 3001.97,761.81 3143.7,761.81 3143.7,476.38 3258.86,476.38
N75591 on Bottom "Bottom-N75591" (solid, remove dead copper, pour order 27): 2299.21,2469.49 2299.21,2434.06 2250.98,2385.83 2250.98,2278.54 2376.97,2278.54 2376.97,2385.83 2328.74,2434.06 2328.74,2469.49
5.0V on Bottom "Bottom-5.0V" (solid, remove dead copper, pour order 26): 27 vertices, not listed, extent 2731.3,2459.65 3289.37,2843.5
12.0V on Bottom "Bottom-12.0V" (solid, remove dead copper, pour order 25): 4322.83,2901.57 4322.83,2854.33 4381.89,2795.28 4478.35,2795.28 4507.87,2824.8 4588.58,2824.8 4602.36,2838.58 4602.36,2942.91 4468.5,2942.91 4427.17,2901.57
5.0V on Bottom "Bottom-5.0V 1" (solid, remove dead copper, pour order 22): 4655.51,2814.96 4514.76,2814.96 4514.76,2514.76 4655.51,2514.76
N14301 on Bottom "Bottom-N14301" (solid, remove dead copper, pour order 17): 3706.69,2553.15 3706.69,2429.13 4244.09,2429.13 4244.09,2553.15
5.0V on Bottom "Bottom-5.0V 2" (solid, remove dead copper, pour order 16): 27 vertices, not listed, extent 2074.8,2459.65 2632.87,2843.5
11V_ANA on Bottom "Bottom-11V_ANA" (solid, remove dead copper, pour order 13): 4124.02,2892.72 4124.02,2846.46 4037.4,2846.46 4037.4,2562.99 4244.09,2562.99 4244.09,2892.72
5.0V on Bottom "Bottom-5.0V 3" (solid, remove dead copper, pour order 12): 3789.37,2899.61 3789.37,2834.65 3851.38,2772.64 3851.38,2562.99 4028.54,2562.99 4028.54,2899.61
5.0V on Bottom "Bottom-5.0V 4" (solid, remove dead copper, pour order 11): 25 vertices, not listed, extent 3465.55,460.63 3822.83,909.45
3.3V on Bottom "Bottom-3.3V" (solid, remove dead copper, pour order 10): 3690.94,2893.7 3580.71,2893.7 3580.71,2854.33 3497.05,2854.33 3497.05,2429.13 3690.94,2429.13
N106386 on Bottom "Bottom-N106386" (solid, remove dead copper, pour order 8): 2955.71,2469.49 2955.71,2434.06 2907.48,2385.83 2907.48,2278.54 3033.46,2278.54 3033.46,2385.83 2985.24,2434.06 2985.24,2469.49
GND on Bottom "Bottom-GND" (solid, remove dead copper, pour order 7): 223 vertices, not listed, extent 9.94,-167.23 6590.46,3716.44
0.9V on Bottom "Bottom-0.9V" (solid, remove dead copper, pour order 5): 2744.09,2252.95 2744.09,1732.28 2901.57,1732.28 2901.57,2056.1 3198.82,2056.1 3198.82,2252.95
GND on Inner Layer 6 "Inner Layer 6-GND" (solid, remove dead copper, pour order 6): 223 vertices, not listed, extent 9.94,-167.23 6590.46,3716.44
GND on Inner Layer 5 "Inner Layer 5-GND" (solid, remove dead copper, pour order 29): 223 vertices, not listed, extent 9.94,-167.23 6590.46,3716.44
1.2V_USB on Inner Layer 5 "Inner Layer 5-1.2V_USB" (solid, remove dead copper, pour order 21): 1013.78,2401.57 1013.78,2923.23 561.02,2923.23 561.02,2608.27 488.19,2608.27 488.19,2401.57
VBUS_USB on Inner Layer 5 "Inner Layer 5-VBUS_USB" (solid, remove dead copper, pour order 15): 478.35,2500 478.35,2618.11 551.18,2618.11 551.18,3051.18 118.11,3051.18 118.11,2529.53 358.27,2529.53 358.27,2500
GND on Inner Layer 3 "Inner Layer 3-GND" (solid, remove dead copper, pour order 24): 223 vertices, not listed, extent 9.94,-167.23 6590.46,3716.44
GND on Inner Layer 2 (split plane): 169 vertices, not listed, extent 12.95,-164.22 6587.45,3713.43

## Keep-outs
Top:
  region: 1145.67,1719.49 1145.67,1400.59 1385.83,1400.59 1385.83,1719.49 1145.67,1719.49
  region: 540.35,3037.4 540.35,3011.81 543.31,3011.81 543.31,3037.4 540.35,3037.4
  region: 564.96,2816.93 896.65,2816.93 896.65,2486.22 564.96,2486.22 564.96,2816.93
  region: 1881.89,624.02 2944.88,624.02 2944.88,1687.01 1881.89,1687.01 1881.89,624.02
  region: 559.06,779.53 783.46,779.53 783.46,787.4 559.06,787.4 559.06,779.53
  region: 1771.65,173.23 1771.65,-175.2 3122.05,-175.2 3122.05,173.23 1771.65,173.23
  region: 4236.22,956.69 4236.22,791.34 4358.27,791.34 4358.27,956.69 4236.22,956.69
  region: 1614.17,796.26 1614.17,878.94 1566.93,878.94 1566.93,804.13 1505.91,804.13 1505.91,768.7 1574.8,768.7 1574.8,796.26 1614.17,796.26
Bottom:
  region: 4202.76,2921.26 4202.76,2895.67 4196.85,2895.67 4196.85,2921.26 4202.76,2921.26
  region: 2859.25,318.9 2885.83,318.9 2885.83,325.79 2859.25,325.79 2859.25,318.9
  region: 3663.39,2915.35 3663.39,2893.7 3669.29,2893.7 3669.29,2915.35 3663.39,2915.35
  region: 1771.65,173.23 1771.65,-175.2 3122.05,-175.2 3122.05,173.23 1771.65,173.23
Keep-Out Layer:
  lines w7.87: 0,0 590.55,0 590.55,287.4 cw(c627.95,287.4) 627.95,324.8 1275.59,324.8 cw(c1275.59,287.4) 1312.99,287.4 1312.99,0 1627.95,0 1627.95,253.94 cw(c1699.8,252.95) 1771.65,253.96 1771.65,-157.48 1791.34,-177.17 2192.91,-177.17 2212.6,-157.48 2212.6,116.14 cw(c2250,116.14) 2287.4,116.14 2287.4,-157.48 2307.09,-177.17 3102.36,-177.17 3122.05,-157.48 3122.05,285.43 cw(c3161.42,285.43) 3161.42,324.8 6600.39,324.8 6600.39,3332.68 629.92,3332.68 cw(c629.92,3372.05) 590.55,3372.05 590.55,3726.38 0,3726.38 0,0

## Other copper
Top:
  text "1" at 398.86,369.02 h39.37
  text "FILM:" at 4200.79,-559.06 h50
  text "COMPOSANT" at 4468.5,-559.06 h50
  text "ARTEMIS" at 5633.86,-562.99 h50
  text "03/03/22" at 5641.73,-673.23 h39.37
  text "DOSSIER:" at 4200.79,-681.1 h50
  text "ART_CARD Rev 5" at 4622.05,-681.1 h50
Inner Layer 3:
  text "3" at 390.42,369.02 h39.37
  text "FILM:" at 4200.79,-559.06 h50
  text "COUCHE INTERNE 2" at 4468.5,-559.06 h50
  text "ARTEMIS" at 5633.86,-562.99 h50
  text "03/03/22" at 5641.73,-673.23 h39.37
  text "DOSSIER:" at 4200.79,-681.1 h50
  text "ART_CARD Rev 5" at 4622.05,-681.1 h50
Inner Layer 4:
  text "4" at 389.49,369.02 h39.37
  text "FILM:" at 4200.79,-559.06 h50
  text "COUCHE INTERNE 3" at 4468.5,-559.06 h50
  text "ARTEMIS" at 5633.86,-562.99 h50
  text "03/03/22" at 5641.73,-673.23 h39.37
  text "DOSSIER:" at 4200.79,-681.1 h50
  text "ART_CARD Rev 5" at 4622.05,-681.1 h50
Inner Layer 5:
  text "5" at 390.42,369.02 h39.37
  text "FILM:" at 4200.79,-559.06 h50
  text "COUCHE INTERNE 4" at 4468.5,-559.06 h50
  text "ARTEMIS" at 5633.86,-562.99 h50
  text "03/03/22" at 5641.73,-673.23 h39.37
  text "DOSSIER:" at 4200.79,-681.1 h50
  text "ART_CARD Rev 5" at 4622.05,-681.1 h50
Inner Layer 6:
  text "6" at 391.36,369.02 h39.37
  text "FILM:" at 4200.79,-559.06 h50
  text "COUCHE INTERNE 5" at 4468.5,-559.06 h50
  text "ARTEMIS" at 5633.86,-562.99 h50
  text "03/03/22" at 5641.73,-673.23 h39.37
  text "DOSSIER:" at 4200.79,-681.1 h50
  text "ART_CARD Rev 5" at 4622.05,-681.1 h50
Inner Layer 7:
  text "7" at 390.42,369.02 h39.37
  text "FILM:" at 4200.79,-559.06 h50
  text "COUCHE INTERNE 6" at 4468.5,-559.06 h50
  text "ARTEMIS" at 5633.86,-562.99 h50
  text "03/03/22" at 5641.73,-673.23 h39.37
  text "DOSSIER:" at 4200.79,-681.1 h50
  text "ART_CARD Rev 5" at 4622.05,-681.1 h50
Bottom:
  text "8" at 406.98,369.02 h39.37
  text "ARTEMIS" at 4586.61,-562.99 h50
  text "SOUDURE" at 5807.09,-562.99 h50
  text "FILM:" at 6043.31,-562.99 h50
  text "03/03/22" at 4566.93,-673.23 h39.37
  text "ART_CARD Rev 5" at 5629.92,-681.1 h50
  text "DOSSIER:" at 6043.31,-681.1 h50